# EAGLE board ThruXtal-SR (EAGLE 5.11)
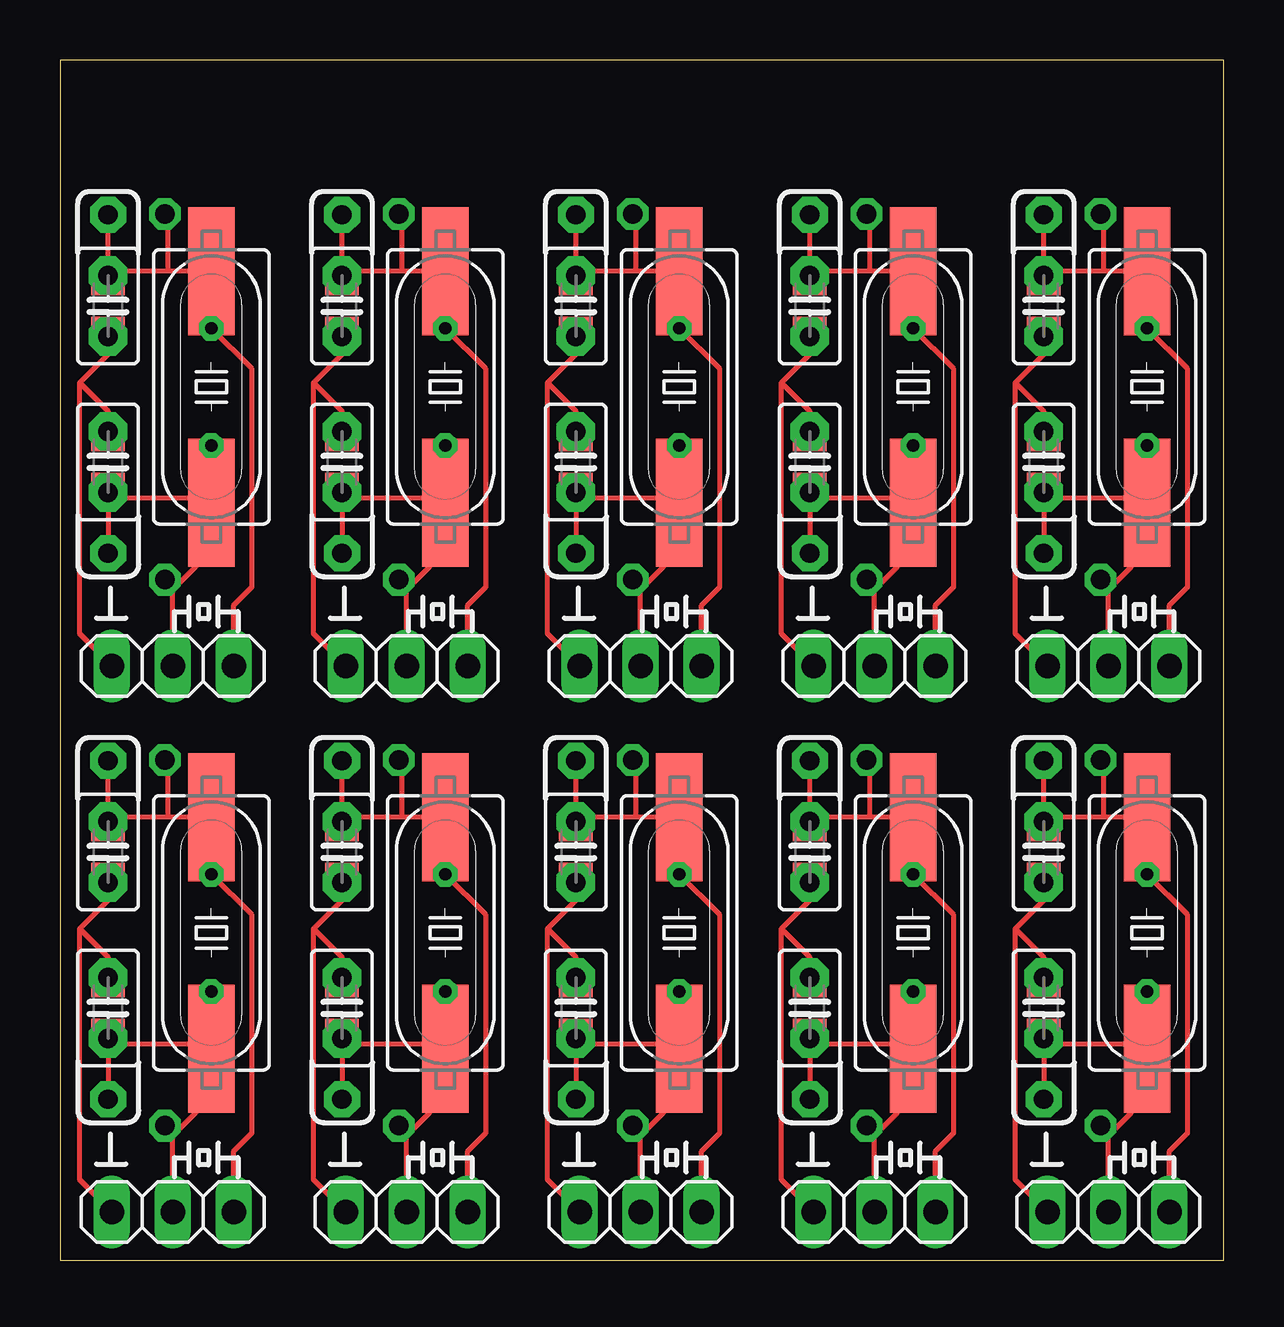
[diagram p0: board, top side]
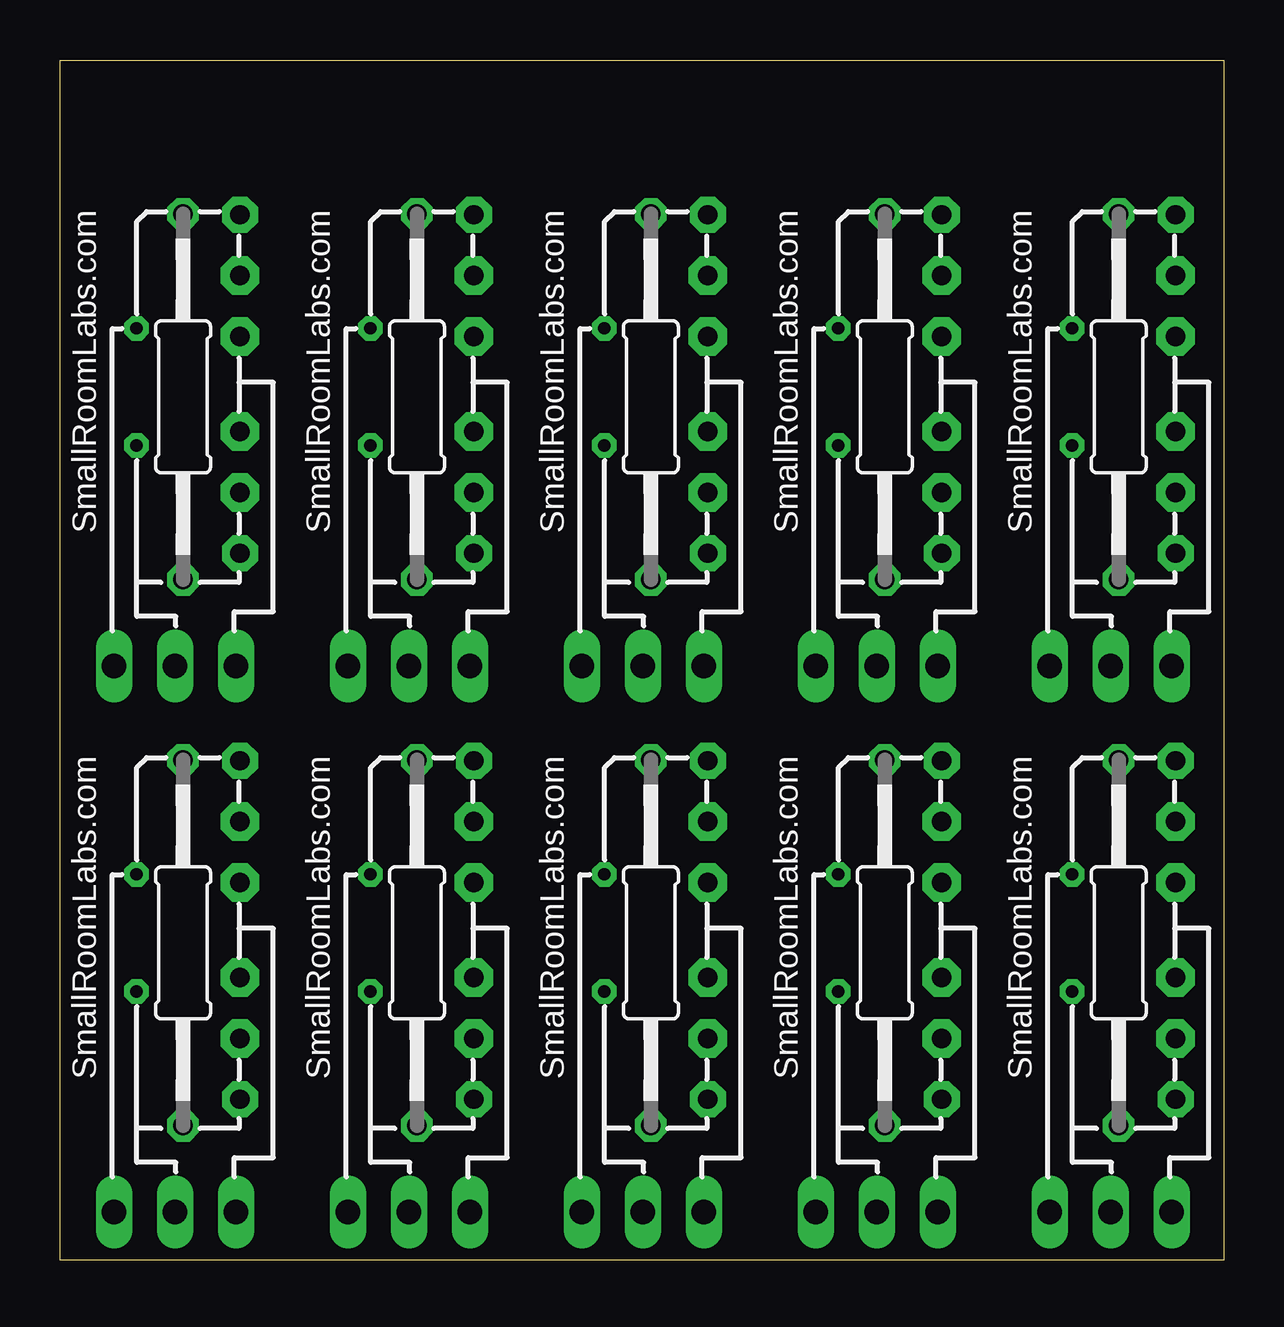
[diagram p1: board, bottom side, seen from below]

Size 48.5 x 50 mm. Coordinates in mm from the lower left corner, seen from the top.
Outline: 0,0 48.5,0 48.5,50 0,50 0,0
Copper layers (1*16): Top 0.035mm / dielectric 1.5mm / Bottom 0.035mm
Design rules "Fusion_eagle_rule_v1.1": minimum track width 6mil, minimum drill 12mil, track to track 6mil, track to pad 6mil, pad to pad 6mil, via to via 6mil, smd to smd 0mil, copper to edge 10mil, drill to drill 10mil, minimum pad ring 10mil, minimum via ring 6mil, stop-mask expansion 2mil, vias tented up to drill 100mil, thermal gap 10mil

## Footprints (pad centres in the part's own frame; a part is rotated, then mirrored left to right if it is on the bottom)
C0.1PTH = drill 0.813 pad 1.6 octagon: 1 -1.27,0; 2 1.27,0
C0805K = smd 1.1 x 1.4: 1 -1,0; 2 1,0
1X03 = drill 1.016 long: 1 -2.54,0; 2 0,0; 3 2.54,0
0207/15 = drill 0.813 octagon: 1 -7.62,0; 2 7.62,0
HC-49U = smd 5.334 x 1.93: 1 -4.826,0; 2 4.826,0
HC-49U-PTH = drill 0.508 octagon: P1 -2.44,0; P2 2.44,0

## Placement (x,y rotation side)
C1  [C0.1PTH]  2,17 270 top
C2  [C0.1PTH]  2,10.5 270 top
C3  [C0805K]  2,17 270 top
C4  [C0805K]  2,10.5 270 top
C5  [C0.1PTH]  11.75,17 270 top
C6  [C0.1PTH]  11.75,10.5 270 top
C7  [C0805K]  11.75,17 270 top
C8  [C0805K]  11.75,10.5 270 top
C9  [C0.1PTH]  21.5,17 270 top
C10  [C0.1PTH]  21.5,10.5 270 top
C11  [C0805K]  21.5,17 270 top
C12  [C0805K]  21.5,10.5 270 top
C13  [C0.1PTH]  31.25,17 270 top
C14  [C0.1PTH]  31.25,10.5 270 top
C15  [C0805K]  31.25,17 270 top
C16  [C0805K]  31.25,10.5 270 top
C17  [C0.1PTH]  41,17 270 top
C18  [C0.1PTH]  41,10.5 270 top
C19  [C0805K]  41,17 270 top
C20  [C0805K]  41,10.5 270 top
C21  [C0.1PTH]  41,39.75 270 top
C22  [C0.1PTH]  41,33.25 270 top
C23  [C0805K]  41,39.75 270 top
C24  [C0805K]  41,33.25 270 top
C25  [C0.1PTH]  21.5,39.75 270 top
C26  [C0.1PTH]  21.5,33.25 270 top
C27  [C0805K]  21.5,39.75 270 top
C28  [C0805K]  21.5,33.25 270 top
C29  [C0.1PTH]  31.25,39.75 270 top
C30  [C0.1PTH]  31.25,33.25 270 top
C31  [C0805K]  31.25,39.75 270 top
C32  [C0805K]  31.25,33.25 270 top
C33  [C0.1PTH]  2,39.75 270 top
C34  [C0.1PTH]  2,33.25 270 top
C35  [C0805K]  2,39.75 270 top
C36  [C0805K]  2,33.25 270 top
C37  [C0.1PTH]  11.75,39.75 270 top
C38  [C0.1PTH]  11.75,33.25 270 top
C39  [C0805K]  11.75,39.75 270 top
C40  [C0805K]  11.75,33.25 270 top
JP1  [1X03]  4.7,2 180 top
JP2  [1X03]  14.45,2 180 top
JP3  [1X03]  24.2,2 180 top
JP4  [1X03]  33.95,2 180 top
JP5  [1X03]  43.7,2 180 top
JP6  [1X03]  43.7,24.75 180 top
JP7  [1X03]  24.2,24.75 180 top
JP8  [1X03]  33.95,24.75 180 top
JP9  [1X03]  4.7,24.75 180 top
JP10  [1X03]  14.45,24.75 180 top
R1  [0207/15]  4.37,13.22 270 bottom
R2  [0207/15]  14.12,13.22 270 bottom
R3  [0207/15]  23.87,13.22 270 bottom
R4  [0207/15]  33.62,13.22 270 bottom
R5  [0207/15]  43.37,13.22 270 bottom
R6  [0207/15]  43.37,35.97 270 bottom
R7  [0207/15]  23.87,35.97 270 bottom
R8  [0207/15]  33.62,35.97 270 bottom
R9  [0207/15]  4.37,35.97 270 bottom
R10  [0207/15]  14.12,35.97 270 bottom
XTAL1  [HC-49U]  6.31,13.63 90 top
XTAL2  [HC-49U-PTH]  6.31,13.63 90 top
XTAL3  [HC-49U]  16.06,13.63 90 top
XTAL4  [HC-49U-PTH]  16.06,13.63 90 top
XTAL5  [HC-49U]  25.81,13.63 90 top
XTAL6  [HC-49U-PTH]  25.81,13.63 90 top
XTAL7  [HC-49U]  35.56,13.63 90 top
XTAL8  [HC-49U-PTH]  35.56,13.63 90 top
XTAL9  [HC-49U]  45.31,13.63 90 top
XTAL10  [HC-49U-PTH]  45.31,13.63 90 top
XTAL11  [HC-49U]  45.31,36.38 90 top
XTAL12  [HC-49U-PTH]  45.31,36.38 90 top
XTAL13  [HC-49U]  25.81,36.38 90 top
XTAL14  [HC-49U-PTH]  25.81,36.38 90 top
XTAL15  [HC-49U]  35.56,36.38 90 top
XTAL16  [HC-49U-PTH]  35.56,36.38 90 top
XTAL17  [HC-49U]  6.31,36.38 90 top
XTAL18  [HC-49U-PTH]  6.31,36.38 90 top
XTAL19  [HC-49U]  16.06,36.38 90 top
XTAL20  [HC-49U-PTH]  16.06,36.38 90 top

## Library data of the parts
C1 C2 C5 C6 C9 C10 C13 C14 C17 C18 C21 C22 C25 C26 C29 C30 C33 C34 C37 C38 XTAL1-XTAL20 = dp_devices
C3 C4 C7 C8 C11 C12 C15 C16 C19 C20 C23 C24 C27 C28 C31 C32 C35 C36 C39 C40 = adafruit
JP1-JP10 = pinhead
R1-R10 = rcl

## Nets
GND: C1.2 C2.1 C3.2 C4.1 JP1.3
GND1: C5.2 C6.1 C7.2 C8.1 JP2.3
GND2: C9.2 C10.1 C11.2 C12.1 JP3.3
GND3: C13.2 C14.1 C15.2 C16.1 JP4.3
GND4: C17.2 C18.1 C19.2 C20.1 JP5.3
GND5: C21.2 C22.1 C23.2 C24.1 JP6.3
GND6: C25.2 C26.1 C27.2 C28.1 JP7.3
GND7: C29.2 C30.1 C31.2 C32.1 JP8.3
GND8: C33.2 C34.1 C35.2 C36.1 JP9.3
GND9: C37.2 C38.1 C39.2 C40.1 JP10.3
XTAL1: C2.2 C4.2 JP1.2 R1.2 XTAL1.1 XTAL2.P1
XTAL2: C1.1 C3.1 JP1.1 R1.1 XTAL1.2 XTAL2.P2
XTAL3: C5.1 C7.1 JP2.1 R2.1 XTAL3.2 XTAL4.P2
XTAL4: C6.2 C8.2 JP2.2 R2.2 XTAL3.1 XTAL4.P1
XTAL5: C9.1 C11.1 JP3.1 R3.1 XTAL5.2 XTAL6.P2
XTAL6: C10.2 C12.2 JP3.2 R3.2 XTAL5.1 XTAL6.P1
XTAL7: C13.1 C15.1 JP4.1 R4.1 XTAL7.2 XTAL8.P2
XTAL8: C14.2 C16.2 JP4.2 R4.2 XTAL7.1 XTAL8.P1
XTAL9: C17.1 C19.1 JP5.1 R5.1 XTAL9.2 XTAL10.P2
XTAL10: C18.2 C20.2 JP5.2 R5.2 XTAL9.1 XTAL10.P1
XTAL11: C21.1 C23.1 JP6.1 R6.1 XTAL11.2 XTAL12.P2
XTAL12: C22.2 C24.2 JP6.2 R6.2 XTAL11.1 XTAL12.P1
XTAL13: C25.1 C27.1 JP7.1 R7.1 XTAL13.2 XTAL14.P2
XTAL14: C26.2 C28.2 JP7.2 R7.2 XTAL13.1 XTAL14.P1
XTAL15: C29.1 C31.1 JP8.1 R8.1 XTAL15.2 XTAL16.P2
XTAL16: C30.2 C32.2 JP8.2 R8.2 XTAL15.1 XTAL16.P1
XTAL17: C33.1 C35.1 JP9.1 R9.1 XTAL17.2 XTAL18.P2
XTAL18: C34.2 C36.2 JP9.2 R9.2 XTAL17.1 XTAL18.P1
XTAL19: C37.1 C39.1 JP10.1 R10.1 XTAL19.2 XTAL20.P2
XTAL20: C38.2 C40.2 JP10.2 R10.2 XTAL19.1 XTAL20.P1

## Tracks (layer width: path | path; a pad name or v marks a point on that pad's centre or on a via)
GND
  Top 0.203: JP1.3 0.81,3.35 0.81,13.8 | 0.81,13.8 2,14.99 C1.2 C3.2 | 0.81,13.8 2,12.61 C2.1 C4.1
GND1
  Top 0.203: JP2.3 10.56,3.35 10.56,13.8 | 10.56,13.8 11.75,14.99 C5.2 C7.2 | 10.56,13.8 11.75,12.61 C6.1 C8.1
GND2
  Top 0.203: JP3.3 20.31,3.35 20.31,13.8 | 20.31,13.8 21.5,14.99 C9.2 C11.2 | 20.31,13.8 21.5,12.61 C10.1 C12.1
GND3
  Top 0.203: JP4.3 30.06,3.35 30.06,13.8 | 30.06,13.8 31.25,14.99 C13.2 C15.2 | 30.06,13.8 31.25,12.61 C14.1 C16.1
GND4
  Top 0.203: JP5.3 39.81,3.35 39.81,13.8 | 39.81,13.8 41,14.99 C17.2 C19.2 | 39.81,13.8 41,12.61 C18.1 C20.1
GND5
  Top 0.203: JP6.3 39.81,26.1 39.81,36.55 | 39.81,36.55 41,37.74 C21.2 C23.2 | 39.81,36.55 41,35.36 C22.1 C24.1
GND6
  Top 0.203: JP7.3 20.31,26.1 20.31,36.55 | 20.31,36.55 21.5,37.74 C25.2 C27.2 | 20.31,36.55 21.5,35.36 C26.1 C28.1
GND7
  Top 0.203: JP8.3 30.06,26.1 30.06,36.55 | 30.06,36.55 31.25,37.74 C29.2 C31.2 | 30.06,36.55 31.25,35.36 C30.1 C32.1
GND8
  Top 0.203: JP9.3 0.81,26.1 0.81,36.55 | 0.81,36.55 2,37.74 C33.2 C35.2 | 0.81,36.55 2,35.36 C34.1 C36.1
GND9
  Top 0.203: JP10.3 10.56,26.1 10.56,36.55 | 10.56,36.55 11.75,37.74 C37.2 C39.2 | 10.56,36.55 11.75,35.36 C38.1 C40.1
XTAL1  (via drill 0.8 pad 1.5)
  Top 0.203: XTAL1.1 XTAL2.P1 | C2.2 C4.2 | C2.2 2.23,9 5.5,9 5.7,8.8 XTAL1.1 | C2.2 v2,6.7 | JP1.2 4.7,5.6 R1.2 4.47,5.5 5,5.5 6.31,6.81 XTAL1.1
XTAL2  (via drill 0.8 pad 1.5)
  Top 0.203: C1.1 C3.1 | C1.1 2.19,18.46 4.5,18.46 | 4.5,18.46 XTAL1.2 XTAL2.P2 8,14.38 8,5.3 7.24,4.54 JP1.1 | C1.1 v2,20.8 | R1.1 4.5,20.84 4.5,18.46
XTAL3  (via drill 0.8 pad 1.5)
  Top 0.203: C5.1 C7.1 | C5.1 11.94,18.46 14.25,18.46 | 14.25,18.46 XTAL3.2 XTAL4.P2 17.75,14.38 17.75,5.3 16.99,4.54 JP2.1 | C5.1 v11.75,20.8 | R2.1 14.25,20.84 14.25,18.46
XTAL4  (via drill 0.8 pad 1.5)
  Top 0.203: XTAL3.1 XTAL4.P1 | C6.2 C8.2 | C6.2 11.98,9 15.25,9 15.45,8.8 XTAL3.1 | C6.2 v11.75,6.7 | JP2.2 14.45,5.6 R2.2 14.22,5.5 14.75,5.5 16.06,6.81 XTAL3.1
XTAL5  (via drill 0.8 pad 1.5)
  Top 0.203: C9.1 C11.1 | C9.1 21.69,18.46 24,18.46 | 24,18.46 XTAL5.2 XTAL6.P2 27.5,14.38 27.5,5.3 26.74,4.54 JP3.1 | C9.1 v21.5,20.8 | R3.1 24,20.84 24,18.46
XTAL6  (via drill 0.8 pad 1.5)
  Top 0.203: XTAL5.1 XTAL6.P1 | C10.2 C12.2 | C10.2 21.73,9 25,9 25.2,8.8 XTAL5.1 | C10.2 v21.5,6.7 | JP3.2 24.2,5.6 R3.2 23.97,5.5 24.5,5.5 25.81,6.81 XTAL5.1
XTAL7  (via drill 0.8 pad 1.5)
  Top 0.203: C13.1 C15.1 | C13.1 31.44,18.46 33.75,18.46 | 33.75,18.46 XTAL7.2 XTAL8.P2 37.25,14.38 37.25,5.3 36.49,4.54 JP4.1 | C13.1 v31.25,20.8 | R4.1 33.75,20.84 33.75,18.46
XTAL8  (via drill 0.8 pad 1.5)
  Top 0.203: XTAL7.1 XTAL8.P1 | C14.2 C16.2 | C14.2 31.48,9 34.75,9 34.95,8.8 XTAL7.1 | C14.2 v31.25,6.7 | JP4.2 33.95,5.6 R4.2 33.72,5.5 34.25,5.5 35.56,6.81 XTAL7.1
XTAL9  (via drill 0.8 pad 1.5)
  Top 0.203: C17.1 C19.1 | C17.1 41.19,18.46 43.5,18.46 | 43.5,18.46 XTAL9.2 XTAL10.P2 47,14.38 47,5.3 46.24,4.54 JP5.1 | C17.1 v41,20.8 | R5.1 43.5,20.84 43.5,18.46
XTAL10  (via drill 0.8 pad 1.5)
  Top 0.203: XTAL9.1 XTAL10.P1 | C18.2 C20.2 | C18.2 41.23,9 44.5,9 44.7,8.8 XTAL9.1 | C18.2 v41,6.7 | JP5.2 43.7,5.6 R5.2 43.47,5.5 44,5.5 45.31,6.81 XTAL9.1
XTAL11  (via drill 0.8 pad 1.5)
  Top 0.203: C21.1 C23.1 | C21.1 41.19,41.21 43.5,41.21 | 43.5,41.21 XTAL11.2 XTAL12.P2 47,37.13 47,28.05 46.24,27.29 JP6.1 | C21.1 v41,43.55 | R6.1 43.5,43.59 43.5,41.21
XTAL12  (via drill 0.8 pad 1.5)
  Top 0.203: XTAL11.1 XTAL12.P1 | C22.2 C24.2 | C22.2 41.23,31.75 44.5,31.75 44.7,31.55 XTAL11.1 | C22.2 v41,29.45 | JP6.2 43.7,28.35 R6.2 43.47,28.25 44,28.25 45.31,29.56 XTAL11.1
XTAL13  (via drill 0.8 pad 1.5)
  Top 0.203: C25.1 C27.1 | C25.1 21.69,41.21 24,41.21 | 24,41.21 XTAL13.2 XTAL14.P2 27.5,37.13 27.5,28.05 26.74,27.29 JP7.1 | C25.1 v21.5,43.55 | R7.1 24,43.59 24,41.21
XTAL14  (via drill 0.8 pad 1.5)
  Top 0.203: XTAL13.1 XTAL14.P1 | C26.2 C28.2 | C26.2 21.73,31.75 25,31.75 25.2,31.55 XTAL13.1 | C26.2 v21.5,29.45 | JP7.2 24.2,28.35 R7.2 23.97,28.25 24.5,28.25 25.81,29.56 XTAL13.1
XTAL15  (via drill 0.8 pad 1.5)
  Top 0.203: C29.1 C31.1 | C29.1 31.44,41.21 33.75,41.21 | 33.75,41.21 XTAL15.2 XTAL16.P2 37.25,37.13 37.25,28.05 36.49,27.29 JP8.1 | C29.1 v31.25,43.55 | R8.1 33.75,43.59 33.75,41.21
XTAL16  (via drill 0.8 pad 1.5)
  Top 0.203: XTAL15.1 XTAL16.P1 | C30.2 C32.2 | C30.2 31.48,31.75 34.75,31.75 34.95,31.55 XTAL15.1 | C30.2 v31.25,29.45 | JP8.2 33.95,28.35 R8.2 33.72,28.25 34.25,28.25 35.56,29.56 XTAL15.1
XTAL17  (via drill 0.8 pad 1.5)
  Top 0.203: C33.1 C35.1 | C33.1 2.19,41.21 4.5,41.21 | 4.5,41.21 XTAL17.2 XTAL18.P2 8,37.13 8,28.05 7.24,27.29 JP9.1 | C33.1 v2,43.55 | R9.1 4.5,43.59 4.5,41.21
XTAL18  (via drill 0.8 pad 1.5)
  Top 0.203: XTAL17.1 XTAL18.P1 | C34.2 C36.2 | C34.2 2.23,31.75 5.5,31.75 5.7,31.55 XTAL17.1 | C34.2 v2,29.45 | JP9.2 4.7,28.35 R9.2 4.47,28.25 5,28.25 6.31,29.56 XTAL17.1
XTAL19  (via drill 0.8 pad 1.5)
  Top 0.203: C37.1 C39.1 | C37.1 11.94,41.21 14.25,41.21 | 14.25,41.21 XTAL19.2 XTAL20.P2 17.75,37.13 17.75,28.05 16.99,27.29 JP10.1 | C37.1 v11.75,43.55 | R10.1 14.25,43.59 14.25,41.21
XTAL20  (via drill 0.8 pad 1.5)
  Top 0.203: XTAL19.1 XTAL20.P1 | C38.2 C40.2 | C38.2 11.98,31.75 15.25,31.75 15.45,31.55 XTAL19.1 | C38.2 v11.75,29.45 | JP10.2 14.45,28.35 R10.2 14.22,28.25 14.75,28.25 16.06,29.56 XTAL19.1

## Text on the board
bPlace: SmallRoomLabs.com | SmallRoomLabs.com | SmallRoomLabs.com | SmallRoomLabs.com | SmallRoomLabs.com | SmallRoomLabs.com | SmallRoomLabs.com | SmallRoomLabs.com | SmallRoomLabs.com | SmallRoomLabs.com